# EAGLE board adapter (EAGLE 8.2.1)
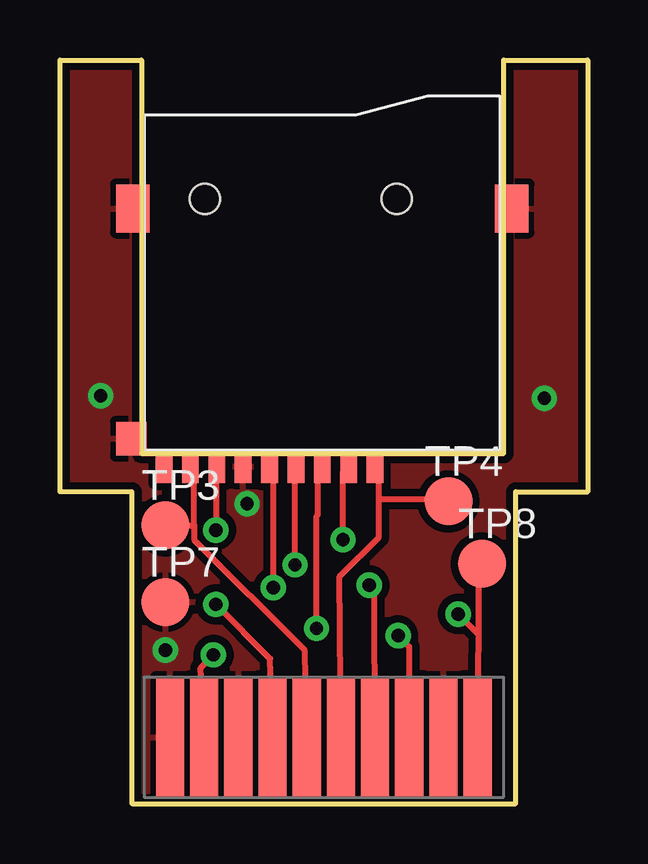
[diagram p0: board, top side]
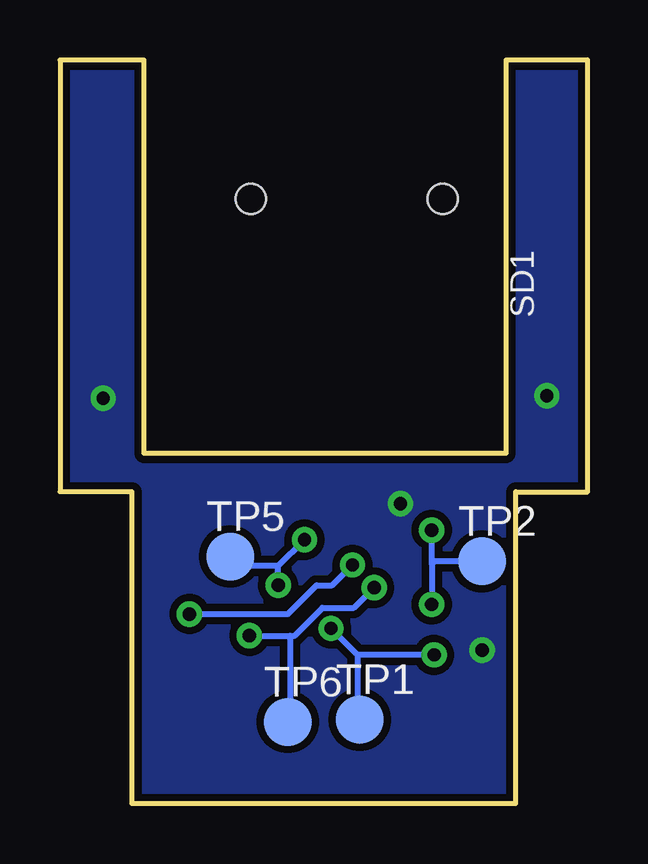
[diagram p1: board, bottom side, seen from below]

Size 22 x 31 mm. Coordinates in mm from the lower left corner, seen from the top.
Outline: 3,0 19,0 19,13 22,13 22,31 18.5,31 18.5,14.6 3.4,14.6 3.4,31 0,31 0,13 3,13 3,0
Copper layers (1*16): Top 0.035mm / dielectric 1.5mm / Bottom 0.035mm
Design rules "SparkFun": minimum track width 8mil, minimum drill 20mil, track to track 8mil, track to pad 8mil, pad to pad 8mil, via to via 8mil, smd to smd 8mil, copper to edge 10mil, drill to drill 8mil, minimum pad ring 12mil, minimum via ring 10mil, stop-mask expansion 4mil, vias tented up to drill 25mil, thermal gap 10mil

## Footprints (pad centres in the part's own frame; a part is rotated, then mirrored left to right if it is on the bottom)
TF-PULL-REVERSE = smd 0.7 x 1.4: 1 2.2,-7.9; 2 1.1,-7.9; 3 0,-7.9; 4 -1.1,-7.9; 5 -2.2,-7.9; 6 -3.3,-7.9; 7 -4.4,-7.9; 8 -5.5,-7.9; 9 -6.6,-7.9 | smd 1.4 x 2: S1 7.9,2.85; S2 -7.9,2.85 | smd 1.28 x 1.4: S3 -7.96,-6.75 | hole 1.25: 3.1,3.25; -4.9,3.25
TP20R = smd 2 x 2: TP 0,0
CONNECTOR = smd 1.175 x 5: CLK 3.562,0; CMD -4.987,0; DAT0 -2.138,0; DAT1 -0.713,0; DAT2 0.713,0; DAT3 2.138,0; GND -6.412,0; GND2 4.987,0; INS -3.562,0; VCC 6.412,0

## Placement (x,y rotation side)
SD1  TF-HOLDERREVERSE  [TF-PULL-REVERSE]  10.94,21.96 0 top
TP1  TPTP20R  [TP20R]  9.5,3.5 0 bottom
TP2  TPTP20R  [TP20R]  4.4,10.1 0 bottom
TP3  TPTP20R  [TP20R]  4.4,11.6 0 top
TP4  TPTP20R  [TP20R]  16.2,12.6 0 top
TP5  TPTP20R  [TP20R]  14.9,10.3 0 bottom
TP6  TPTP20R  [TP20R]  12.5,3.4 0 bottom
TP7  TPTP20R  [TP20R]  4.4,8.4 0 top
TP8  TPTP20R  [TP20R]  17.6,10 0 top
U$1  CONNECTOR  [CONNECTOR]  11,2.77 0 top

## Library data of the parts
SD1 = sd-mmc
TP1-TP8 = testpad
U$1 = untitled

## Nets
GND: SD1.6 SD1.S1 SD1.S2 SD1.S3 TP7.TP U$1.GND U$1.GND2 U$1.INS
N$1: SD1.4 TP8.TP U$1.VCC
N$3: SD1.3 TP1.TP U$1.CMD
N$5: SD1.7 TP2.TP U$1.DAT0
N$6: SD1.8 TP3.TP U$1.DAT1
N$7: SD1.1 TP4.TP U$1.DAT2
N$8: SD1.2 TP5.TP U$1.DAT3
N$9: SD1.5 TP6.TP U$1.CLK

## Tracks (layer width: path | path; a pad name or v marks a point on that pad's centre or on a via)
GND  (via drill 0.55)
  other vias: 7.8,12.5 4.4,6.4 1.7,17 20.2,16.9
  pour Top (isolate 0.305): 0,31 3.4,31 3.4,14.7 3.5,14.6 18.4,14.6 18.5,31 22,31 22,13 19,13 19,0 3,0 3,13 0,13
  pour Bottom (isolate 0.305): 0,31 3.4,31 3.4,14.7 3.5,14.6 18.4,14.6 18.4,16.1 18.5,16.2 18.5,31 22,31 22,13 19,13 19,0 3,0 3,13 0,13
N$1  (via drill 0.55)
  Top 0.254: U$1.VCC 17.47,7.03 | 17.47,7.03 v16.6,7.9 | v9.8,9.95 9.8,14.02 SD1.4 | 17.47,7.03 17.47,9.87 TP8.TP
  Bottom 0.254: v16.6,7.9 12.5,7.9 11.3,9.1 10.65,9.1 v9.8,9.95
N$3  (via drill 0.55)
  Top 0.254: U$1.CMD 5.87,5.66 v6.4,6.2 | v10.7,7.3 10.7,11.98 10.76,12.04 10.76,13.88 SD1.3
  Bottom 0.254: v6.4,6.2 9.6,6.2 | 9.6,6.2 v10.7,7.3 | 9.6,6.2 9.6,3.6 TP1.TP
N$5  (via drill 0.55)
  Top 0.254: U$1.DAT0 8.77,6.03 v6.5,8.3 | v6.5,11.4 6.5,14.02 SD1.7
  Bottom 0.254: 6.5,10 v6.5,8.3 | 6.5,10 v6.5,11.4 | TP2.TP 6.4,10.1 6.5,10
N$6
  Top 0.254: U$1.DAT1 10.22,6.38 5.6,11 5.6,11.6 | 5.6,11.6 5.6,13.9 SD1.8 | TP3.TP 5.6,11.6
N$7
  Top 0.254: U$1.DAT2 11.66,9.47 13.3,11.1 13.3,12.7 | 13.3,12.7 13.3,13.9 SD1.1 | 13.3,12.7 16.1,12.7 TP4.TP
N$8  (via drill 0.55)
  Top 0.254: U$1.DAT3 13.12,8.88 v12.9,9.1 | v11.8,11 11.8,13.82 SD1.2
  Bottom 0.254: v12.9,9.1 12.9,9.9 | 12.9,9.9 v11.8,11 | 12.9,9.9 14.5,9.9 TP5.TP
N$9  (via drill 0.55)
  Top 0.254: U$1.CLK 14.56,6.53 v14.1,7 | v8.9,9 8.9,13.9 SD1.5
  Bottom 0.254: v14.1,7 12.4,7 | 12.4,7 12.22,7 11.06,8.16 9.74,8.16 v8.9,9 | 12.4,7 12.4,3.5 TP6.TP